# Altium PCB coilcube_v5.PcbDoc
Units mil, origin at the board's own origin, x right, y up, seen from the top; angles counter-clockwise.
Board outline 3005 x 1125 mil, 2 copper layers (Top Layer, Bottom Layer); 74 components, 50 nets, 233 pads, 54 vias.
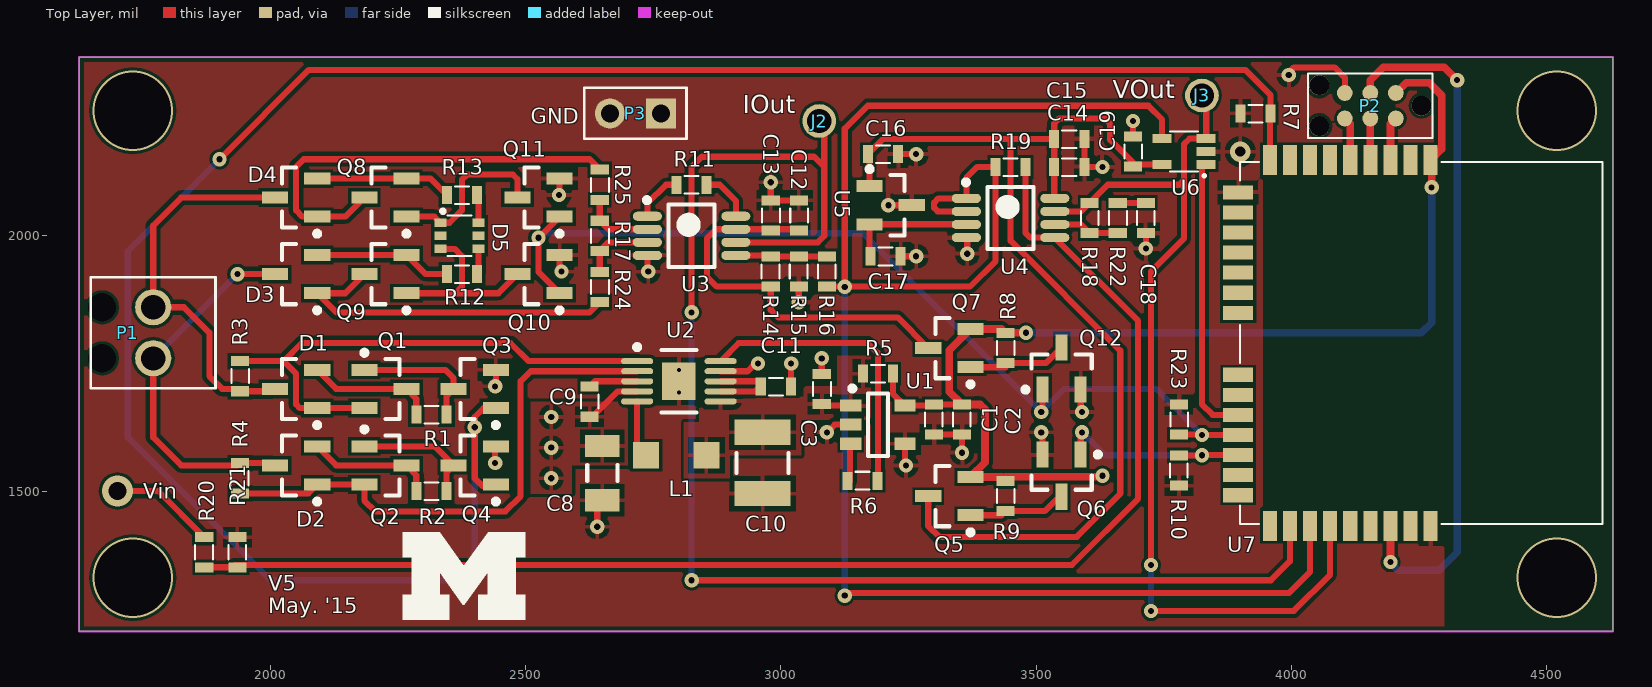
[diagram p0: Top Layer view]
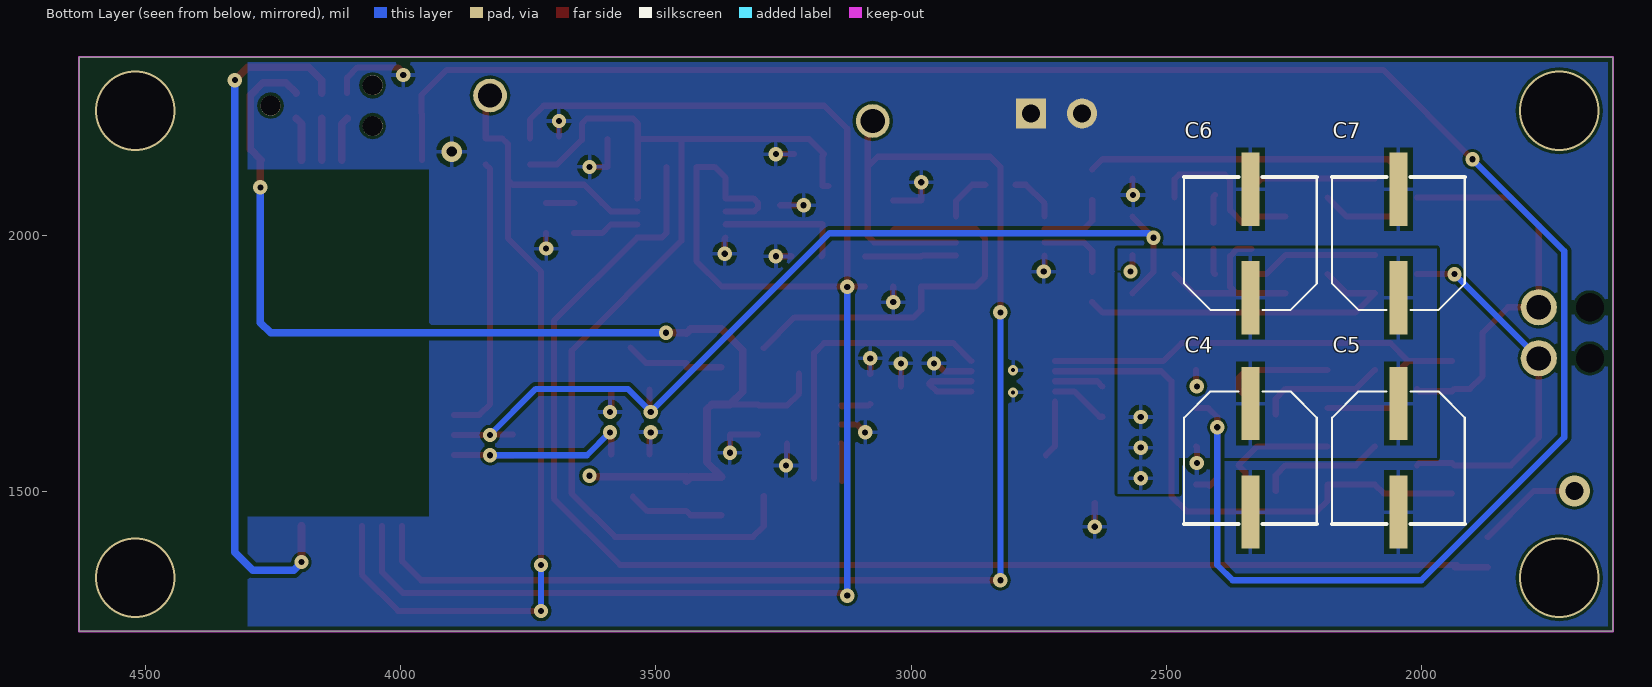
[diagram p1: Bottom Layer view, seen from below]

## Layer stack, top to bottom
Top Solder: solder mask 0.4, Solder Resist, Dk 3.5
Top Layer: signal copper 1.4
Dielectric 1: dielectric 12.6, FR-4, Dk 4.8
Bottom Layer: signal copper 1.4
Bottom Solder: solder mask 0.4, Solder Resist, Dk 3.5

## Board outline
1625,1225 1625,2350 4630,2350 4630,1225

## Design rules (kind name [scope] priority, off if disabled: settings)
Clearance polyPour [inPolygon vs istrack] p1: gap=8 // Sunstone Circuits Minimum Clearance Rule (Double Sided)
Clearance "Clearance~Sunstone Circuits" [All] p2: gap=6 // Sunstone Circuits Minimum Clearance Rule (Double Sided)
HoleSize "HoleSize~Sunstone Circuits" [All] p1: absolutevalues=TRUE maxlimit=251 minlimit=8 maxpercent=80.000 minpercent=20.000 // SSC Hole Size Rule For Single Sided & Double Sided Designs.
HoleSize Testpoint [All] p2: absolutevalues=TRUE maxlimit=100 minlimit=1 maxpercent=80.000 minpercent=20.000
HoleSize TestPointUsage [All] p3: absolutevalues=TRUE maxlimit=100 minlimit=1 maxpercent=80.000 minpercent=20.000
MinimumAnnularRing "MinimumAnnularRing~Sunstone Circuits" [All] p1: minimumring=7 // Sunstone Circuits Minimum Annular Ring (Double Sided)
PlaneClearance "PlaneClearance~Sunstone Circuits" [All] p1: clearance=12 // Sunstone Circuits Power Plane Clearance Rule (Double Sided)
PlaneConnect "PlaneConnect~Sunstone Circuits" [All] p1: planeconnectstyle=Relief reliefexpansion=10 reliefentries=4 reliefconductorwidth=8 reliefairgap=10 // Sunstone Circuits Power Plane Connect Rule (Double Sided)
PolygonConnect "PolygonConnect~Sunstone Circuits" [All] p1: connectstyle=Relief reliefconductorwidth=8 reliefentries=4 polygonreliefangle="90 Angle" airgapwidth=10 // Sunstone Circuits Polygon Connect Style (Double Sided)
RoomDefinition proc [InComponentClass('proc')] p1: confinementstyle=ConfineIn formatcopy=TRUE lockcomponents=FALSE outline 3853.38,1389.2 3853.38,2190.8 4020.98,2190.8 4020.98,2329.96 4289.02,2329.96 4289.02,2190.8 4621.61,2190.8 4621.61,1389.2
RoomDefinition IVSense [InComponentClass('IVSense')] p2 off: confinementstyle=ConfineIn formatcopy=TRUE lockcomponents=FALSE outline 1835.39,1323.74 1835.39,1436.26 1961.26,1436.26 1961.26,2155.87 2610.39,2155.87 2610.39,2156.26 3015.4,2156.26 3015.4,2284.9 3765.4,2284.9 3765.4,2334.9 3885,2334.9 3885,2215.1 3865.01,2215.1 3865.01,2102.56 3814.61,2102.56 3814.61,1483.74 3640.71,1483.74 3640.71,1441.26 3474.61,1441.26 3474.61,1433.74 3418.74,1433.74 3418.74,1399.29 1969.61,1399.29 1969.61,1323.74
RoomDefinition harvesting [InComponentClass('harvesting')] p3 off: confinementstyle=ConfineIn formatcopy=TRUE lockcomponents=FALSE outline 1632.44,1688.44 1632.44,1931.56 1901.14,1931.56 1901.14,2175.95 1901.14,2274.61 3873.74,2274.61 3986.26,2274.61 3986.26,2205.39 3389.61,2205.39 3389.61,1583.74 3276.82,1583.74 3276.82,1548.15 3216.26,1548.15 3216.26,1485.39 3039.94,1485.39 3039.94,1449.53 2699.37,1449.53 2699.37,1444.29 2478.86,1444.29 2478.86,1374.05 1901.14,1374.05 1901.14,1688.44
RoutingVias "RoutingVias~Sunstone Circuits" [All] p1: holewidth=16 width=30 viastyle="Through Hole" minholewidth=12 minwidth=28 maxholewidth=20 maxwidth=40 // Sunstone Circuits Routing Vias Rule (Double Sided)
ShortCircuit "ShortCircuit~Sunstone Circuits" [All] p1: allowed=FALSE // Sunstone Circuits Short Circuit Rule~Do Not Allow (Double Sided)
SolderMaskExpansion TentVias [isvia] p1: expansion=-20 // Sunstone Circuits Solder Mask Expansion Rule (Double Sided)
SolderMaskExpansion "SolderMaskExpansion~Sunstone Circuits" [All] p2: expansion=3 // Sunstone Circuits Solder Mask Expansion Rule (Double Sided)
UnpouredPolygon [All] p1: allowunpoured=FALSE
ViasUnderSMD "ViasUnderSMD~Sunstone Circuits" [All] p1: allowed=FALSE // Sunstone Circuits Vias Under SMD~Do Not Allow (Double Sided)
Width "Width~Sunstone Circuits" [All] p1: maxlimit=100 minlimit=6 preferedwidth=10 // Sunstone Circuits Minimum Width Rule (Double Sided)
25 further rules are at their usual default settings.

## Classes and differential pairs
component class harvesting: C1 C2 C3 C4 C5 C6 C7 C8 C9 C10 C11 D1 D2 L1 P1 P3 Q1 Q2 Q3 Q4 R1 R2 R3 R4 R5 R6 R7 U1 U2
component class IVSense: C12 C13 C14 C15 C16 C17 C18 C19 D3 D4 D5 J2 J3 Q5 Q6 Q7 Q8 Q9 Q10 Q11 Q12 R8 R9 R10 R11 R12 R13 R14 R15 R16 R17 R18 R19 R20 R21 R22 R23 R24 R25 U3 U4 U5 U6
component class proc: P2 U7

## Components (designator, comment, footprint, x,y, rotation, side; value= is the part's Value field where it differs from the comment)
C1 "Ceramic capacitor" 0603 3300,1640 r270 top
C2 "Ceramic capacitor" 0603 3355,1640 r270 top
C3 "Ceramic capacitor" 0603 3080,1700 r90 top
C4 "Aluminum capacitor" KEMET_EDK_9H 2335,1565 r90 bottom
C5 "Aluminum capacitor" KEMET_EDK_9H 2045,1565 r90 bottom
C6 "Aluminum capacitor" KEMET_EDK_9H 2335,1985 r270 bottom
C7 "Aluminum capacitor" KEMET_EDK_9H 2045,1985 r270 bottom
C8 "Ceramic capacitor" 1206 2650,1535 r270 top
C9 "Ceramic capacitor" 0603 2625,1675 r90 top
C10 "Ceramic capacitor" 1210 2960,1555 r90 top
C11 "Ceramic capacitor" 0603 2990,1705 r0 top
C12 "Ceramic capacitor" 0603 3035,2040 r90 top
C13 "Ceramic capacitor" 0603 2980,2040 r90 top
C14 "Ceramic capacitor" 0603 3565,2135 r0 top
C15 "Ceramic capacitor" 0603 3565,2190 r0 top
C16 "Ceramic capacitor" 0603 3200,2160 r0 top
C17 "Ceramic capacitor" 0603 3205,1960 r0 top
C18 "Ceramic capacitor" 0603 3715,2035 r270 top
C19 "Ceramic capacitor" 0603 3690,2165 r90 top
D1 "D_BAS40-04" SOT23-3 2050,1700 r180 top
D2 "D_BAS40-04" SOT23-3 2050,1550 r180 top
D3 "D_BAS40-04" SOT23-3 2050,1925 r180 top
D4 "D_BAS40-04" SOT23-3 2050,2075 r180 top
D5 "BAS40TW" SOT-363 2370,2000 r270 top
J2 "5004" TestPoint 3075,2225 r0 top
J3 "5004" TestPoint 3825,2275 r0 top
L1 "Chip inductor" CDRH2D18 2795,1570 r180 top
P1 "Screw connector" MPT_2position 1770,1810 r270 top
P2 "TC2030" TC2030-IDC-NLFP 4155,2255 r180 top
P3 "1 x 2 header" "1x2 header" 2715,2240 r180 top
Q1 "Si2342DS" SOT23-3 2225,1700 r0 top
Q2 "Si2342DS" SOT23-3 2225,1550 r0 top
Q3 "Si2338DS" SOT23-3 2400,1700 r180 top
Q4 "Si2338DS" SOT23-3 2400,1550 r180 top
Q5 "Si2309CDS" SOT23-3 3330,1490 r180 top
Q6 "Si2338DS" SOT23-3 3550,1530 r270 top
Q7 "Si2309CDS" SOT23-3 3330,1780 r180 top
Q8 "Si2301CDS" SOT23-3 2225,2075 r180 top
Q9 "Si2301CDS" SOT23-3 2225,1925 r180 top
Q10 "Si2338DS" SOT23-3 2525,1925 r180 top
Q11 "Si2338DS" SOT23-3 2525,2075 r180 top
Q12 "Si2338DS" SOT23-3 3550,1740 r90 top
R1 "Chip resistor" 0603 2315,1650 r0 top
R2 "Chip resistor" 0603 2315,1500 r0 top
R3 "Chip resistor" 0603 1940,1725 r90 top
R4 "Chip resistor" 0603 1940,1525 r270 top
R5 "Chip resistor" 0603 3190,1730 r0 top
R6 "Chip resistor" 0603 3160,1520 r180 top
R7 "Chip resistor" 0603 3930,2240 r0 top
R8 "Chip resistor" 0603 3440,1780 r90 top
R9 "Chip resistor" 0603 3440,1490 r90 top
R10 "Chip resistor" 0603 3780,1540 r270 top
R11 "Chip resistor" 0603 2825,2100 r180 top
R12 "Chip resistor" 0603 2375,1925 r0 top
R13 "Chip resistor" 0603 2375,2080 r0 top
R14 "Chip resistor" 0603 2980,1930 r270 top
R15 "Chip resistor" 0603 3035,1930 r270 top
R16 "Chip resistor" 0603 3090,1930 r270 top
R17 "Chip resistor" 0603 2645,2000 r90 top
R18 "Chip resistor" 0603 3605,2035 r90 top
R19 "Chip resistor" 0603 3450,2135 r0 top
R20 "Chip resistor" 0603 1870,1380 r270 top
R21 "Chip resistor" 0603 1935,1380 r270 top
R22 "Chip resistor" 0603 3660,2035 r90 top
R23 "Chip resistor" 0603 3780,1640 r90 top
R24 "Chip resistor" 0603 2645,1900 r90 top
R25 "Chip resistor" 0603 2645,2100 r90 top
U1 "TPS783" SOT23-5 3190,1630 r0 top
U2 "LTC3588-1" TSSOP50P490X110_HS-11N 2800,1715 r0 top
U3 "INA333" MSOP-8 2825,2000 r0 top
U4 "MCP6032" MSOP-8 3450,2035 r0 top
U5 "ISL21080" SOT23-3 3215,2060 r0 top
U6 "TS881" SC70-5 3790,2165 r90 top
U7 "ATUM" ATUM 4275,1790 r180 top

## Footprints (in the part's own frame and the unit in brackets; to place one, negate y for a bottom-side part, rotate by r counter-clockwise, add the part's x,y. Pads: shape width x height; smd on the part's side, far side on the other; paste and mask are expansions set on the pad)
"1x2 header" [mm] "1x2 header, 100 mils"
  rect 1.5x1.5 hole 0.9: 1(-1.27,0)
  round 1.5 hole 0.9: 2(1.27,0)
  silkscreen extent -2.54,-1.27 2.54,1.27, body extent -2.53,-1.26 2.53,1.26, height 8.38
0603 [mm] "2-Leads, Body 1.55x0.85mm, IPC Medium Density"
  rect 0.5x0.9 smd: 1(-0.75,0) 2(0.75,0)
  silkscreen extent -0.35,-0.45 0.35,0.43, body extent -0.75,-0.42 0.75,0.43, height 0.5
1206 [mm]
  rect 1.1x1.7 smd: 1(-1.35,0) 2(1.35,0)
  silkscreen extent -0.4,-0.75 0.4,0.75, body extent -1.7,-0.9 1.7,0.9, height 1.3
1210 [mm]
  rect 1.25x2.8 smd: 1(1.525,-0.102) 2(-1.525,-0.102)
  silkscreen extent -0.5,-1.4 0.5,1.2, body extent -1.8,-1.5 1.8,1.3, height 2.8
ATUM [mm]
  rect 0.7x1.5 smd: 1(0.05,-9.1) 2(1.05,-9.1) 3(2.05,-9.1) 4(3.05,-9.1) 5(4.05,-9.1) 6(5.05,-9.1) 7(6.05,-9.1) 8(7.05,-9.1) 9(8.05,-9.1) 24(8.05,9.1) 25(7.05,9.1) 26(6.05,9.1) 27(5.05,9.1) 28(4.05,9.1) 29(3.05,9.1) 30(2.05,9.1) 31(1.05,9.1) 32(0.05,9.1)
  rect 1.5x0.7 smd: 10(9.629,-7.5) 11(9.629,-6.5) 12(9.629,-5.5) 13(9.629,-4.5) 14(9.629,-3.5) 15(9.629,-2.5) 16(9.629,-1.5) 17(9.629,1.579) 18(9.629,2.579) 19(9.629,3.579) 20(9.629,4.579) 21(9.629,5.579) 22(9.629,6.579) 23(9.629,7.579)
  silkscreen extent -8.5,-9 9.53,9
CDRH2D18 [mm] "Sumdia SMD power inductor"
  rect 1.3x1.3 smd: 1(-1.5,0) 2(1.5,0)
  body extent -1.5,-1.7 1.5,1.8, height 2
KEMET_EDK_9H [mm] "Kemet surface mount aluminum capacitor EDK series 9H"
  rect 3.64x0.91 smd: 1(2.7,0) 2(-2.7,0)
  silkscreen extent -3.3,-3.3 3.3,3.3, body extent -3.3,-3.3 3.3,3.3, height 8.7
MPT_2position [mm] "Screw connector 2 pos"
  round 1.8 hole 1.2: 1(-1.27,0) 2(1.27,0)
  round 0 hole 1.4: ""(-1.27,-2.54) ""(1.27,-2.54)
  silkscreen extent -2.77,-3.1 2.77,3.1
MSOP-8 [mm] "TSOP, 8-Leads, Body 3.00x3.00mm, Pitch 0.65mm, IPC Medium Density"
  oval 1.45x0.45 smd: 1(-2.2,0.975) 2(-2.2,0.325) 3(-2.2,-0.325) 4(-2.2,-0.975) 5(2.2,-0.975) 6(2.2,-0.325) 7(2.2,0.325) 8(2.2,0.975)
  silkscreen extent -2.35,-1.55 1.15,1.9, body extent -1.55,-1.55 1.55,1.55, height 1.1
SC70-5 [mm]
  rect 0.45x0.95 smd: 1(-0.65,-1.1) 2(0,-1.1) 3(0.65,-1.1) 4(0.65,1.1) 5(-0.65,1.1)
  silkscreen extent -1.2,-1.01 1,0.7, body extent -1,-0.7 1,0.7, height 1.1
SOT23-3 [mm] "SOT23, 3-Leads, Body 2.9x1.3mm, Pitch 0.95mm, Lead Span 2.3mm, IPC Medium Density"
  rect 1.3x0.6 smd: 1(-1.05,0.95) 2(-1.05,-0.95) 3(1.05,0)
  silkscreen extent -1.18,-1.5 0.7,1.92, body extent -0.7,-1.5 0.7,1.5, height 1.2
SOT23-5 [mm] "SOT23, 5-Leads, Body 2.90x2.45mm, Pitch 0.95mm, IPC Medium Density"
  rect 1.05x0.6 smd: 1(-1.35,0.95) 2(-1.35,0) 3(-1.35,-0.95) 4(1.35,-0.95) 5(1.35,0.95)
  silkscreen extent -1.4,-1.55 0.5,1.92, body extent -0.88,-1.52 0.87,1.53, height 1.45
SOT-363 [mm]
  rect 0.42x0.6 smd: 1(-0.65,-0.95) 2(0,-0.95) 3(0.65,-0.95) 4(0.65,0.95) 5(0,0.95) 6(-0.65,0.95)
  silkscreen extent -1.28,-0.88 1,0.6, body extent -1,-0.6 1,0.6, height 1
TC2030-IDC-NLFP [mil]
  round 39 hole 39 unplated: 0(-100,0) 0(100,-40) 0(100,40)
  round 31 smd paste-196.85: 1(-50,-25) 2(-50,25) 3(0,-25) 4(0,25) 5(50,-25) 6(50,25)
  Top Layer pour cut-out: -50,25 -50,-25 50,-25 50,25
  silkscreen extent -122,-63 122,63
TestPoint [mm]
  round 1.68 hole 1.2: 1(0,0)
  body extent -1.26,-1.27 1.27,1.27, height 4.57
TSSOP50P490X110_HS-11N [mm] "TSSOP, 10-Leads, Body 3.00x3.00mm, Pitch 0.50mm, Thermal Pad 1.88.2x1.68.2mm, IPC Medium Density"
  oval 1.6x0.3 smd: 1(-2.075,1) 2(-2.075,0.5) 3(-2.075,0) 4(-2.075,-0.5) 5(-2.075,-1) 6(2.075,-1) 7(2.075,-0.5) 8(2.075,0) 9(2.075,0.5) 10(2.075,1)
  rect 1.68x1.88 smd: 11(0,0)
  silkscreen extent -2.2,-1.55 0.87,1.82, body extent -1.55,-1.55 1.55,1.55, height 1.1

## Part data
C1 C11: library part C_4.7u_10V_0603_ceramic, "Ceramic capacitor, 4.7u, 10V, 0603 package"
C2 C3 C9: library part C_1u_16V_0603_ceramic, "Ceramic capacitor, 1 uF, 16 V, 0603 package"
C4 C5 C6 C7: library part C_100u_35V_aluminum, "Aluminum capacitor, 100 uF, 35 V, KEMET EDK 9H"
C8: library part C_22u_35V_1206_ceramic, "Ceramic capacitor, 22 uF, 35 V, 1206 package"
C10: library part C_100u_10V_1210_ceramic, "Ceramic capacitor, 100u, 1210 package"
C12 C15 C18: library part C_10u_6.3V_0603_ceramic, "Ceramic capacitor, 10 uF, 0603 package"
C13 C14 C16 C17 C19: library part C_0.1u_25V_0603_ceramic, "Ceramic capacitor, 0.1 uF, 0603 package"
D1 D2 D3 D4: "SURFACE MOUNT SCHOTTKY BARRIER DIODE"
D5: library part D_BAS40TW, "SURFACE MOUNT SCHOTTKY BARRIER DIODE ARRAYS"
J2 J3: library part TestPoint, "TEST POINT PC MINI .040\"D YELLOW"
L1: library part L_10uH_1A_180m, "Chip inductor, 10 uH,  1A, 180 mOhm"
P1: library part MPT_2POS, "Screw connector 2 positions"
P2: "TC2030-MCP-NL"
P3: "100 mils standard header"
Q1 Q2: "N-Channel 8 V (D-S) MOSFET"
Q3 Q4 Q6 Q10 Q11 Q12: "N-Channel 30 V (D-S) MOSFET"
Q5 Q7: "P-Channel 60-V (D-S) MOSFET"
Q8 Q9: "P-Channel 20 V (D-S) MOSFET"
R1 R2 R7 R8 R9 R10 R23: library part R_1M_0603, "Chip resistor, 1 Meg, 0603 package"
R3 R4 R5 R6 R16 R20: library part R_0_0603, "Chip resistor, 0, 0603 package"
R11 R17 R18 R19 R21 R24 R25: library part R_100K_0603, "Chip resistor, 100K, 0603 package"
R12 R13: library part R_47K_0603, "Chip resistor, 47K, 0603 package"
R14: library part R_150K_0603, "Chip resistor, 150K, 0603 package"
R15: library part R_300K_0603, "Chip resistor, 300K, 0603 package"
R22: library part R_1K_0603, "Chip resistor, 1 K, 0603 package"
U1: "TPS783xx 500-nA IQ, 150-mA, Ultralow Quiescent Current  Low-Dropout Linear Regulator"
U2: "Piezoelectric Energy   Harvesting Power Supply"
U3: "Micro-Power (50£gA), Zero-Drift, Rail-to-Rail Out  Instrumentation Amplifier"
U4: "0.9 £gA, High Precision Op Amps"
U5: "300nA NanoPower Voltage References"
U6: "Rail-to-rail 0.9 V nanopower comparator"

## Via types
v1: diameter 28, hole 12, Top Layer to Bottom Layer, 46 vias
v2: diameter 157.48, hole 149.61, Top Layer to Bottom Layer, 4 vias
v3: diameter 19.68, hole 7.87, Top Layer to Bottom Layer, 2 vias
v4: diameter 40, hole 20, Top Layer to Bottom Layer, 1 vias
v5: diameter 60, hole 35, Top Layer to Bottom Layer, 1 vias

## Nets (pads, with @x,y where several pads share a name; then routed paths per layer and width w, separated by ;. In a path a pad name is that pad's centre, name@x,y a point inside that pad or via, vN(x,y) a via of type N, cw(c..) or ccw(c..) an arc to the next point about the centre after c; other vN are vias at no path point)
CURRENT_WAVEFORM: J2.1 U3.6 U7.25 | length 2751.6
  Top Layer w12: v1(2825,1325) 3960,1325 3997.44,1362.44 U7.25 ; v1(2825,1850) 2825,2135 2845,2155 3065,2155 3085,2135 ; U3.6 3072.2,1987.2 3085,2000 3085,2135 ; J2.1 3085,2215 3085,2135
  Bottom Layer w12: v1(2825,1325) v1(2825,1850)
CURRENTMEASUREEN: Q10.1 Q11.1 Q12.1 R23.1 U7.20 | length 1850.1
  Top Layer w12: Q10.1 2525,1928.94 v1(2525,1996.26) Q11.1 ; v1(3510,1655) 3512.6,1657.6 Q12.1 ; R23.1 3824.53,1610.47 v1(3825.28,1609.72) U7.20
  Bottom Layer w12: v1(2525,1996.26) 2533.74,2005 3160,2005 v1(3510,1655) 3555,1700 3735,1700 v1(3825.28,1609.72)
GND: C1.2 C2.2 C3.2 C4.2 C5.2 C6.2 C7.2 C8.2 C10.2 C11.2 C12.2 C13.2 C14.2 C15.2 C16.2 C17.2 C18.2 C19.2 P2.5 P3.1 P3.2 Q3.2 Q4.2 Q6.2 Q10.2 Q11.2 Q12.2 R7.1 R10.2 R15.2 R21.1 R23.2 U1.2 U1.4 U2.9 U2.11 U3.4 U4.4 U5.3 U6.2 U7.10 U7.32 | length 1217.5
  Top Layer w12: v1(2440,1555) 2440,1586.06 Q4.2 ; v1(2440,1705) 2441.34,1706.34 Q3.2 ; v1(2565,2080) 2566.34,2081.34 Q11.2 ; Q10.2 2566.34,1933.66 v1(2570,1930) ; v1(2640,1430) C8.2@2640,1476.85 ; U3.4 2738.39,1931.61 v1(2740,1930) ; U2.9 2934.69,1734.69 2950,1750 v1(2955,1750) ; v1(2980,2105) C13.2 C12.2 ; C11.2 3019.53,1749.53 v1(3020,1750) ; v1(3035,1870) R15.2 ; C3.2 v1(3080,1760) ; v1(3090,1615) 3105,1630 U1.2 ; v1(3210.43,2060) U5.3 ; C16.2 v1(3265,2160) ; C17.2 v1(3265,1960) ; U1.4 3243.15,1551.85 v1(3245,1550) ; C1.2 C2.2 v1(3355,1575) ; U4.4 3365,1995 v1(3365,1965) ; v1(3510,1615) 3512.6,1612.4 Q6.2 ; Q12.2 3587.4,1657.6 v1(3590,1655) ; C15.2 C14.2 v1(3630,2135) ; C19.2 v1(3690,2225) ; v1(3715,1975) C18.2 ; v1(3995,2315) 3995,2320 4005,2330 4085,2330 4105,2310 P2.5
  other v3: 2800,1693.35 2800,1736.65
  other v4: 3900,2165
HARVEST_DISABLE: Q3.1 Q4.1 R7.2 U7.9 | length 4195.6
  Top Layer w12: v1(1900,2150) 2075,2325 3910,2325 3959.53,2275.47 R7.2 3958.07,2238.54 U7.9 ; Q4.1 2417.6,1512.6 2415,1510 2400,1525 v1(2400,1625) 2400,1645 2417.6,1662.6 Q3.1
  Bottom Layer w12: v1(1900,2150) 1720,1970 1720,1605 2000,1325 2370,1325 2400,1355 v1(2400,1625)
IN+: R17.1 R24.2 U3.3 | length 141.3
  Top Layer w12: R24.2 R17.1 2661.73,1987.2 U3.3
IN-: R17.2 R25.1 U3.2 | length 141.3
  Top Layer w12: R25.1 R17.2 2661.73,2012.8 U3.2
NetC9_2: C9.2 U2.3 | length 97.6
  Top Layer w12: C9.2 2635.47,1715 U2.3
NetC11_1: C11.1 U2.7 U2.8 | length 174.8
  Top Layer w12: U2.7 2949.84,1695.32 2965,1710.47 2960.47,1715 U2.8
NetC18_1: C18.1 R22.2 | length 55
  Top Layer w12: R22.2 C18.1
NetD1_1: D1.1 Q1.2 R3.2 U2.1 | length 1039.2
  Top Layer w12: R3.2 2025.47,1754.53 ; Q1.2 D1.1 2057.4,1662.6 2050,1670 2050,1730 2025.47,1754.53 ; U2.1 2505.63,1754.37 2470,1790 2060.94,1790 2025.47,1754.53
NetD1_2: D1.2 Q1.3 R1.1 | length 248.4
  Top Layer w12: D1.2 2128.74,1700 Q1.3 2285.47,1680.87 R1.1
NetD1_3: D1.3 D4.3 P1.1 R3.1 | length 779.9
  Top Layer w12: D1.3 2004.13,1695.47 R3.1 1935.47,1700 1905,1700 1880,1725 1880,1810 1830,1860 P1.1 1770,2020 1825,2075 D4.3
NetD2_1: D2.1 Q2.2 R4.2 U2.2 | length 1071.1
  Top Layer w12: R4.2 2074.21,1495.47 D2.1 Q2.2 2183.66,1481.34 2205,1460 2460,1460 2490,1490 2490,1715 2509.69,1734.69 U2.2
NetD2_2: D2.2 Q2.3 R2.1 | length 248.4
  Top Layer w12: D2.2 2128.74,1550 Q2.3 2285.47,1530.87 R2.1
NetD2_3: D2.3 D3.3 P1.2 R4.1 | length 727.2
  Top Layer w12: P1.2 1770,1605 1825,1550 1935.47,1550 R4.1 2004.13,1554.53 D2.3 ; v1(1935,1925) D3.3
  Bottom Layer w12: P1.2 v1(1935,1925)
NetD3_1: D3.1 Q9.3 R24.1 | length 685.3
  Top Layer w12: Q9.3 2146.26,1887.6 D3.1 2128.94,1850 2625,1850 R24.1@2645,1870
NetD3_2: D3.2 Q9.2 R12.1 | length 269.6
  Top Layer w12: D3.2 Q9.2 2303.74,1925 R12.1
NetD4_1: D4.1 Q8.3 R25.2 | length 848.8
  Top Layer w12: Q8.3 2146.26,2037.6 D4.1 2062.4,2037.6 2050,2050 2050,2135 2065,2150 2625,2150 R25.2@2645,2130
NetD4_2: D4.2 Q8.2 R13.1 | length 267.6
  Top Layer w12: D4.2 Q8.2 2313.07,2112.4 R13.1
NetD5_1: D5.1 Q8.1 Q11.3 | length 336.5
  Top Layer w12: Q8.1 2320.59,2037.6 D5.1 2350.59,2025.59 2375,2050 2375,2110 2385,2120 2475,2120 2483.66,2111.34 Q11.3
NetD5_3: D5.3 Q9.1 Q10.3 | length 358.7
  Top Layer w12: Q9.1 2362.6,1887.6 ; D5.3 2360.59,1974.41 2375,1960 2375,1900 2362.6,1887.6 ; Q10.3 2446.26,1887.6 2362.6,1887.6
NetD5_4: D5.4 R12.2 | length 50.6
  Top Layer w12: R12.2 2407.4,1927.87 D5.4
NetD5_6: D5.6 R13.2 | length 55.6
  Top Layer w12: R13.2 2407.4,2077.13 D5.6
NetL1_2: L1.2 U2.5 | length 112.9
  Top Layer w12: U2.5 2718.31,1587.64 L1.2
NetQ1_1: Q1.1 Q3.3 R1.2 | length 258.8
  Top Layer w12: Q1.1 2342.6,1737.4 2358.66,1721.34 Q3.3 2344.53,1685.87 R1.2
NetQ2_1: Q2.1 Q4.3 R2.2 | length 246.3
  Top Layer w12: Q2.1 2321.26,1587.4 Q4.3 2344.53,1535.87 R2.2
NetQ5_1: Q5.1 Q6.3 R9.1 | length 188.6
  Top Layer w12: Q5.1 3432.13,1452.6 R9.1 3516.81,1460.47 Q6.3@3545,1488.66
NetQ7_1: Q7.1 Q12.3 R8.1 | length 191.4
  Top Layer w12: Q7.1 R8.1@3440,1742.6 ; R8.1 3519.13,1750.47 Q12.3
NetR6_2: R6.2 U1.3 | length 73.2
  Top Layer w12: R6.2@3135.47,1520 3135.47,1591.22 U1.3
NetR11_1: R11.1 U3.8 | length 100.2
  Top Layer w12: R11.1 2880,2100 2911.61,2068.39 U3.8
NetR11_2: R11.2 U3.1 | length 97.3
  Top Layer w12: U3.1 2738.39,2063.39 2775,2100 R11.2
NetR14_1: R14.1 R15.1 R16.1 U3.5 | length 179.3
  Top Layer w12: U3.5 2977.91,1961.61 R14.1 R15.1 R16.1
NetR18_1: R18.1 R22.1 U4.6 | length 130.3
  Top Layer w12: U4.6 3588.27,2022.2 R18.1 R22.1
NetR19_2: R19.2 R20.2 R21.2 U4.5 | length 2658.4
  Top Layer w12: R20.2 R21.2 ; R21.2@1930,1355 3570,1355 3700,1485 3700,1833.23 U4.5 3488.39,1996.61 3479.53,2005.47 R19.2
PGOOD: R6.1 U2.10 | length 576.8
  Top Layer w12: U2.10 2917.32,1790 3170,1790 3190,1770 R6.1@3190,1524.53
R\E\S\E\T\: P2.3 U7.30 | length 1363.4
  Top Layer w15: P2.3 4155,2305 4180,2330 4300,2330 v1(4325,2305) ; v1(4194.29,1360.71) U7.30
  Bottom Layer w15: v1(4194.29,1360.71) 4210,1345 4290,1345 4325,1380 v1(4325,2305)
TCK: P2.4 U7.4 | length 81.8
  Top Layer w15: U7.4 4154.92,2229.92 P2.4
TDO: P2.6 U7.5 | length 86.1
  Top Layer w15: P2.6 4115.55,2219.45 U7.5
TMS: P2.2 U7.3 | length 86.2
  Top Layer w15: U7.3 4194.29,2219.29 P2.2
V_HARVEST: C3.1 C10.1 L1.1 R5.1 U1.1 U2.6 | length 60.9
  Top Layer w12: C3.1 3083.07,1667.4 U1.1 U1.1@3134.92,1665.47
VCAP: C4.1 C5.1 C6.1 C7.1 C8.1 C9.1 U2.4 | length 114
  Top Layer w12: C9.1 2630.47,1645.47 2680.32,1695.32 U2.4
  other v1: 2550,1525 2550,1585 2550,1645
VCC3: C1.1 C2.1 P2.1 Q5.2 Q7.2 R5.2 R8.2 R9.2 U1.5 U7.1 | length 2314.3
  Top Layer w12: R5.2 3219.53,1691.02 U1.5 3297.87,1667.4 C1.1 C2.1
  Top Layer w15: v1(3480,1810) 3440.47,1810 R8.2 3432.13,1817.4 Q7.2 3330,1776.06 3330,1694.53 C2.1 3389.53,1669.53 3390,1670 3400,1660 3400,1556.06 Q5.2 3432.13,1527.4 R9.2 3440,1527.75 3632.75,1527.75 3635,1530 v1(3630,1530) ; P2.1 4225,2300 4270,2300 4295,2275 4295,2170.24 U7.1 4275,2146.3 v1(4275,2095)
  Bottom Layer w15: v1(3480,1810) 4255,1810 4275,1830 v1(4275,2095)
VCC3_GATED1: C14.1 C15.1 C16.1 C19.1 Q5.3 U4.8 U5.1 U6.5 | length 2134.5
  Top Layer w12: U5.1@3162.4,2097.4 U5.1 3173.66,2156.81 C16.1 3200.47,2190 3450,2190 ; Q5.3 3288.66,1431.34 3310,1410 3580,1410 3665,1495 3665,1775 3450,1990 3450,2190 ; U4.8 3535.47,2074.53 C14.1 C15.1 ; U6.5 3693.94,2139.41 3645,2188.35 3645,2220 3635,2230 3545,2230 3535.47,2220.47 C15.1 ; 3450,2190 C15.1
VCC3_GATED2: C12.1 C13.1 Q7.3 R14.2 U3.7 | length 781.6
  Top Layer w12: C12.1 3032.68,2012.8 U3.7 2872.8,2012.8 2855,1995 2855,1920 2874.53,1900.47 R14.2 2980,1855 2995,1840 3228.66,1840 Q7.3
VOLTAGE_WAVEFORM: J3.1 R18.2 U4.7 U6.3 U7.27 | length 1832.8
  Top Layer w12: U4.7 3588.27,2047.8 R18.2 3640.47,2100 3780,2100 3790,2110 ; v1(3725,1265) 4005,1265 4076.18,1336.18 U7.27 ; v1(3725,1355) 3725,1930 3790,1995 3790,2110 ; J3.1 3833.31,2266.69 U6.3 3800.59,2190.59 3790,2180 3790,2110
  Bottom Layer w12: v1(3725,1265) v1(3725,1355)
VOLTAGEMEASUREEN: Q6.1 R10.1 U7.21 | length 414.6
  Top Layer w12: Q6.1 3587.4,1612.4 v1(3590,1615) ; R10.1 3824.53,1569.53 v1(3825,1570) 3825.35,1570.35 U7.21
  Bottom Layer w12: v1(3590,1615) 3635,1570 v1(3825,1570)
VOLTAGESENSEIN: R20.1 | length 207.5
  Top Layer w12: v5(1700,1500) 1779.53,1500 R20.1
VOLTAGETRIGGER: U6.1 U7.19 | length 552.4
  Top Layer w12: U6.1 3825,2131.1 3825,1670 3845.91,1649.09 U7.19
VREF: C17.1 U4.3 U5.2 | length 253.2
  Top Layer w12: C17.1 3173.66,1961.81 U5.2 3362.99,2022.6 U4.3
VREF_BUF: R16.2 R19.1 U4.1 U4.2 U6.4 U7.26 | length 3412.7
  Top Layer w12: R16.2 v1@3125,1900.47 ; v1(3125,1295) 3125,1300 3995,1300 4036.81,1341.81 U7.26 ; U4.2 3307.2,2047.8 3300,2055 3300,2065 3308.39,2073.39 U4.1 3363.39,2113.39 3385,2135 R19.1 3420.47,1950.47 3370.47,1900.47 v1@3125,1900.47 ; U6.4 3746.69,2228.31 3720,2255 3170,2255 3125,2210 v1@3125,1900.47
  Bottom Layer w12: v1(3125,1295) v1(3125,1900)
pads on no net: D5.2 D5.5 P1. P2.0 U7.2 U7.6 U7.7 U7.8 U7.11 U7.12 U7.13 U7.14 U7.15 U7.16 U7.17 U7.18 U7.22 U7.23 U7.24 U7.28 U7.29 U7.31
copper on no net:
  other v2: 1730,1330 4520,1330 1730,2245 4520,2245

## Polygon pours and split planes (outlines as drawn)
V_HARVEST on Top Layer "Top Layer-No Net" (solid, pour order 2): 2840,1635 2840,1685 3045,1685 3045,1705 3110,1705 3110,1765 3180,1765 3180,1640 3040,1640 3040,1570 2900,1570 2900,1525 2810,1525 2810,1635
VCAP on Top Layer "Top Layer-No Net" (solid, pour order 4): 2700,1550 2700,1675 2510,1675 2510,1535 2510,1495 2590,1495 2590,1550
GND on Top Layer "Top Layer-No Net" (solid, pour order 10): 1625,2350 1625,1225 4630,1225 4630,2350
VCAP on Bottom Layer "Top Layer-No Net" (solid, pour order 6): 1970,1975 1970,1565 2170,1565 2475,1565 2475,1495 2595,1495 2595,1975
GND on Bottom Layer "Top Layer-No Net" (solid, pour order 8): 1625,2355 1625,1230 2435,1230 4630,1230 4630,2355

## Keep-outs
Keep-Out Layer:
  the board outline again, w3.94

## Other copper
Top Layer:
  pour cut-out: 3944.1,2130 3944.1,1450 4300,1450 4300,1225 4630,1225 4630,1450 4630,2130 4630,2350 4300,2350 4300,2130
Bottom Layer:
  pour cut-out: 3944.1,2130 3944.1,1450 4300,1450 4300,1225 4630,1225 4630,1450 4630,2130 4630,2350 4300,2350 4300,2130

## Silkscreen, mask and mechanical layers (free items; w line width, h text height)
Top Overlay:
  region: 2258.6,1247.69 2349.95,1247.69 2349.95,1296.46 2331.37,1296.46 2331.37,1340.58 2376.66,1277.11 2379.75,1277.11 2425.81,1340.58 2425.81,1296.46 2407.23,1296.46 2407.23,1247.69 2498.58,1247.69 2498.58,1296.46 2480,1296.46 2480,1370 2498.58,1370 2498.58,1418.77 2426.2,1418.77 2379.75,1354.52 2377.43,1354.52 2330.98,1418.77 2258.6,1418.77 2258.6,1370 2276.41,1370 2276.41,1296.46 2258.6,1296.46
  text "VOut" at 3650,2270 h36
  text "IOut" at 2925,2240 h36
  text "GND" at 2510,2220 h30
  text "Vin" at 1750,1485 h30
  text "V5" at 1995,1305 h30
  text "May. '15" at 1995,1260 h30